# EAGLE board ACB-R1.1-43-CH04 (EAGLE 8.5.2)
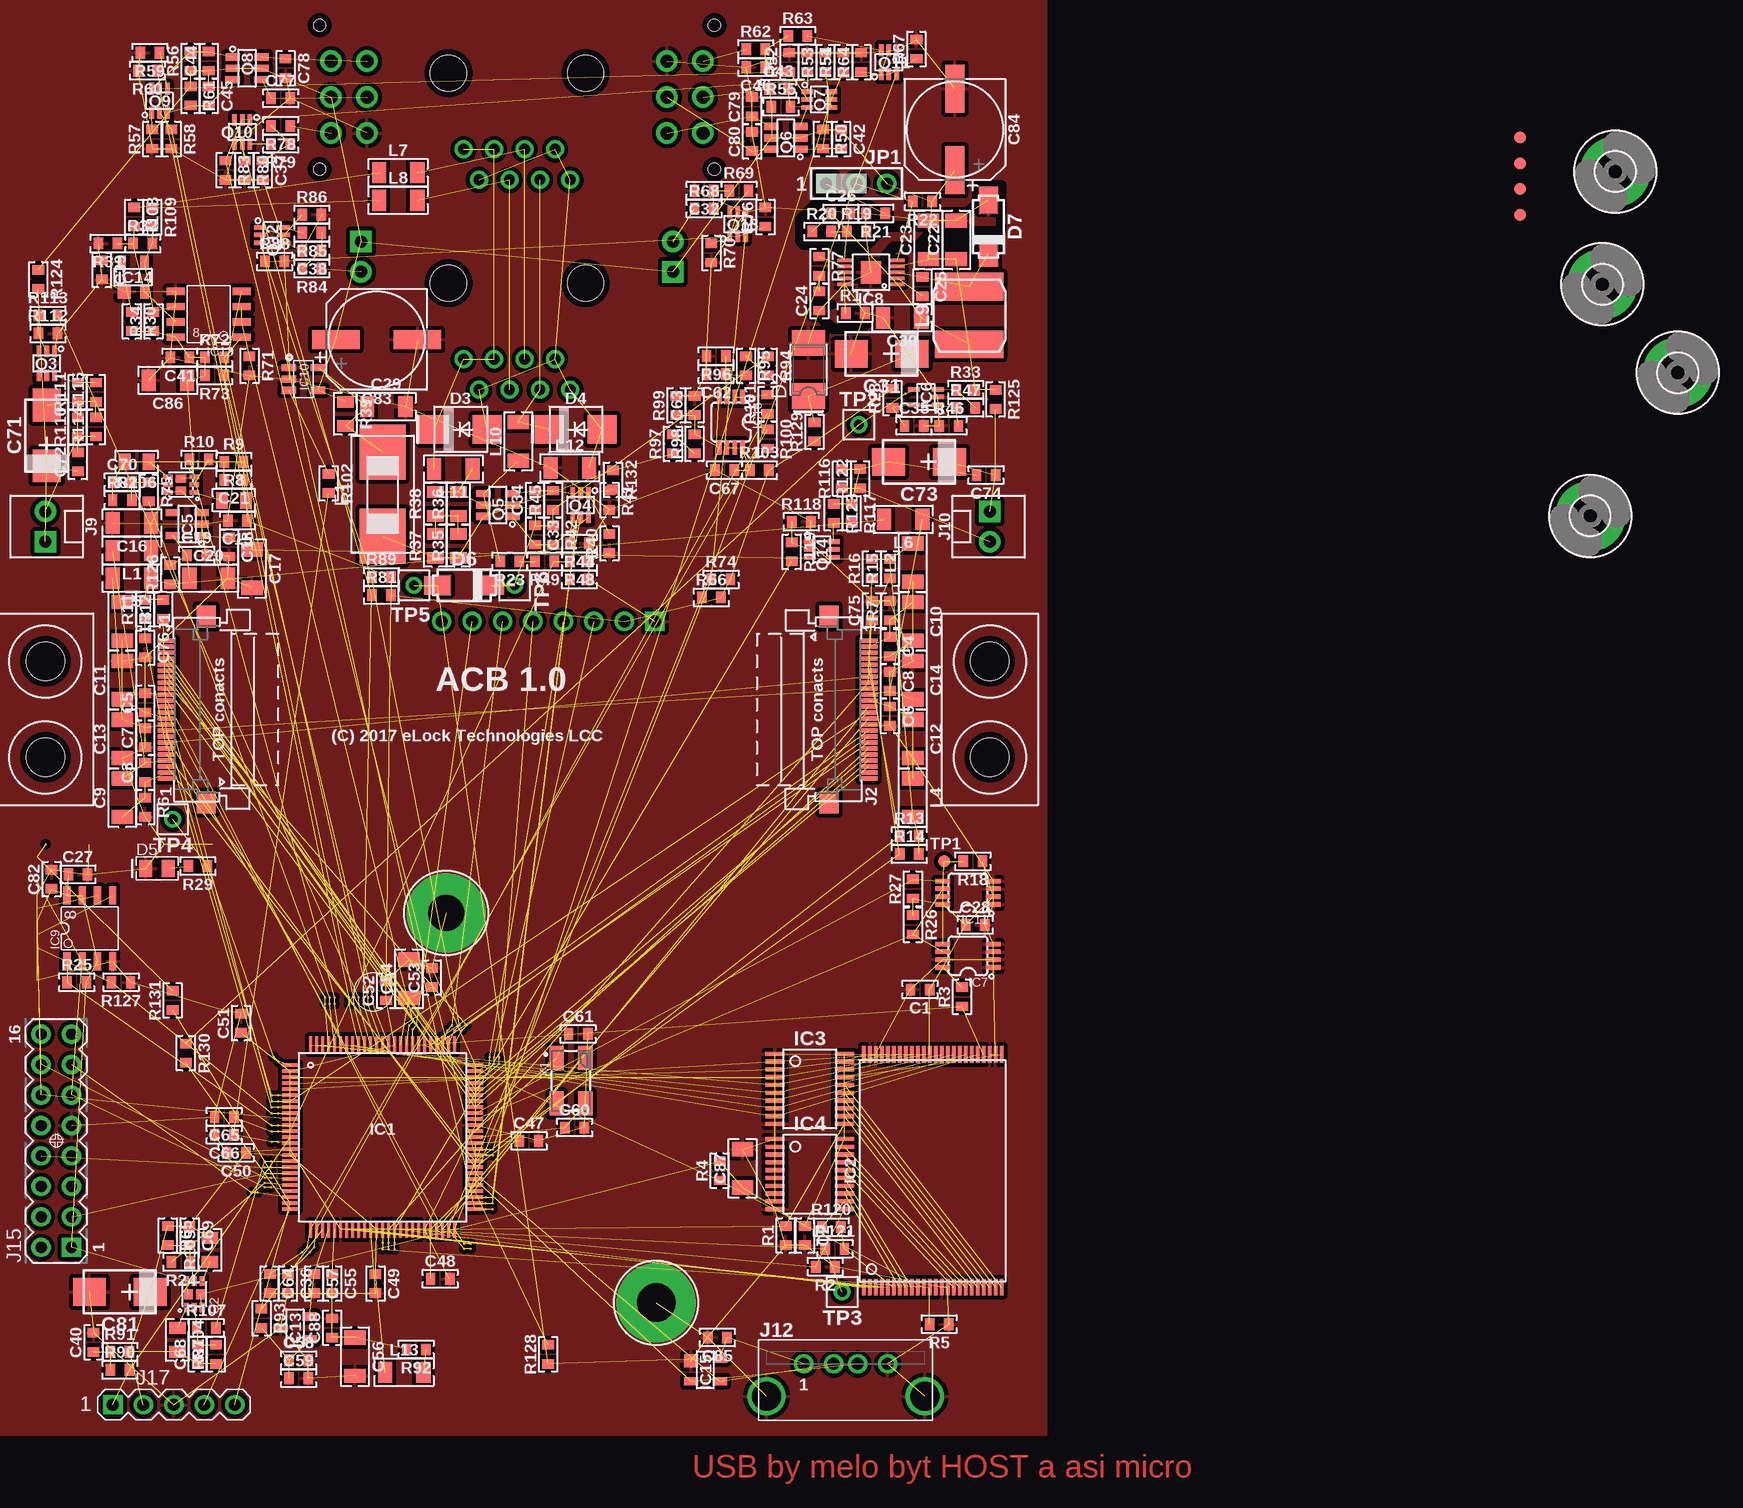
[diagram p0: board, top side]
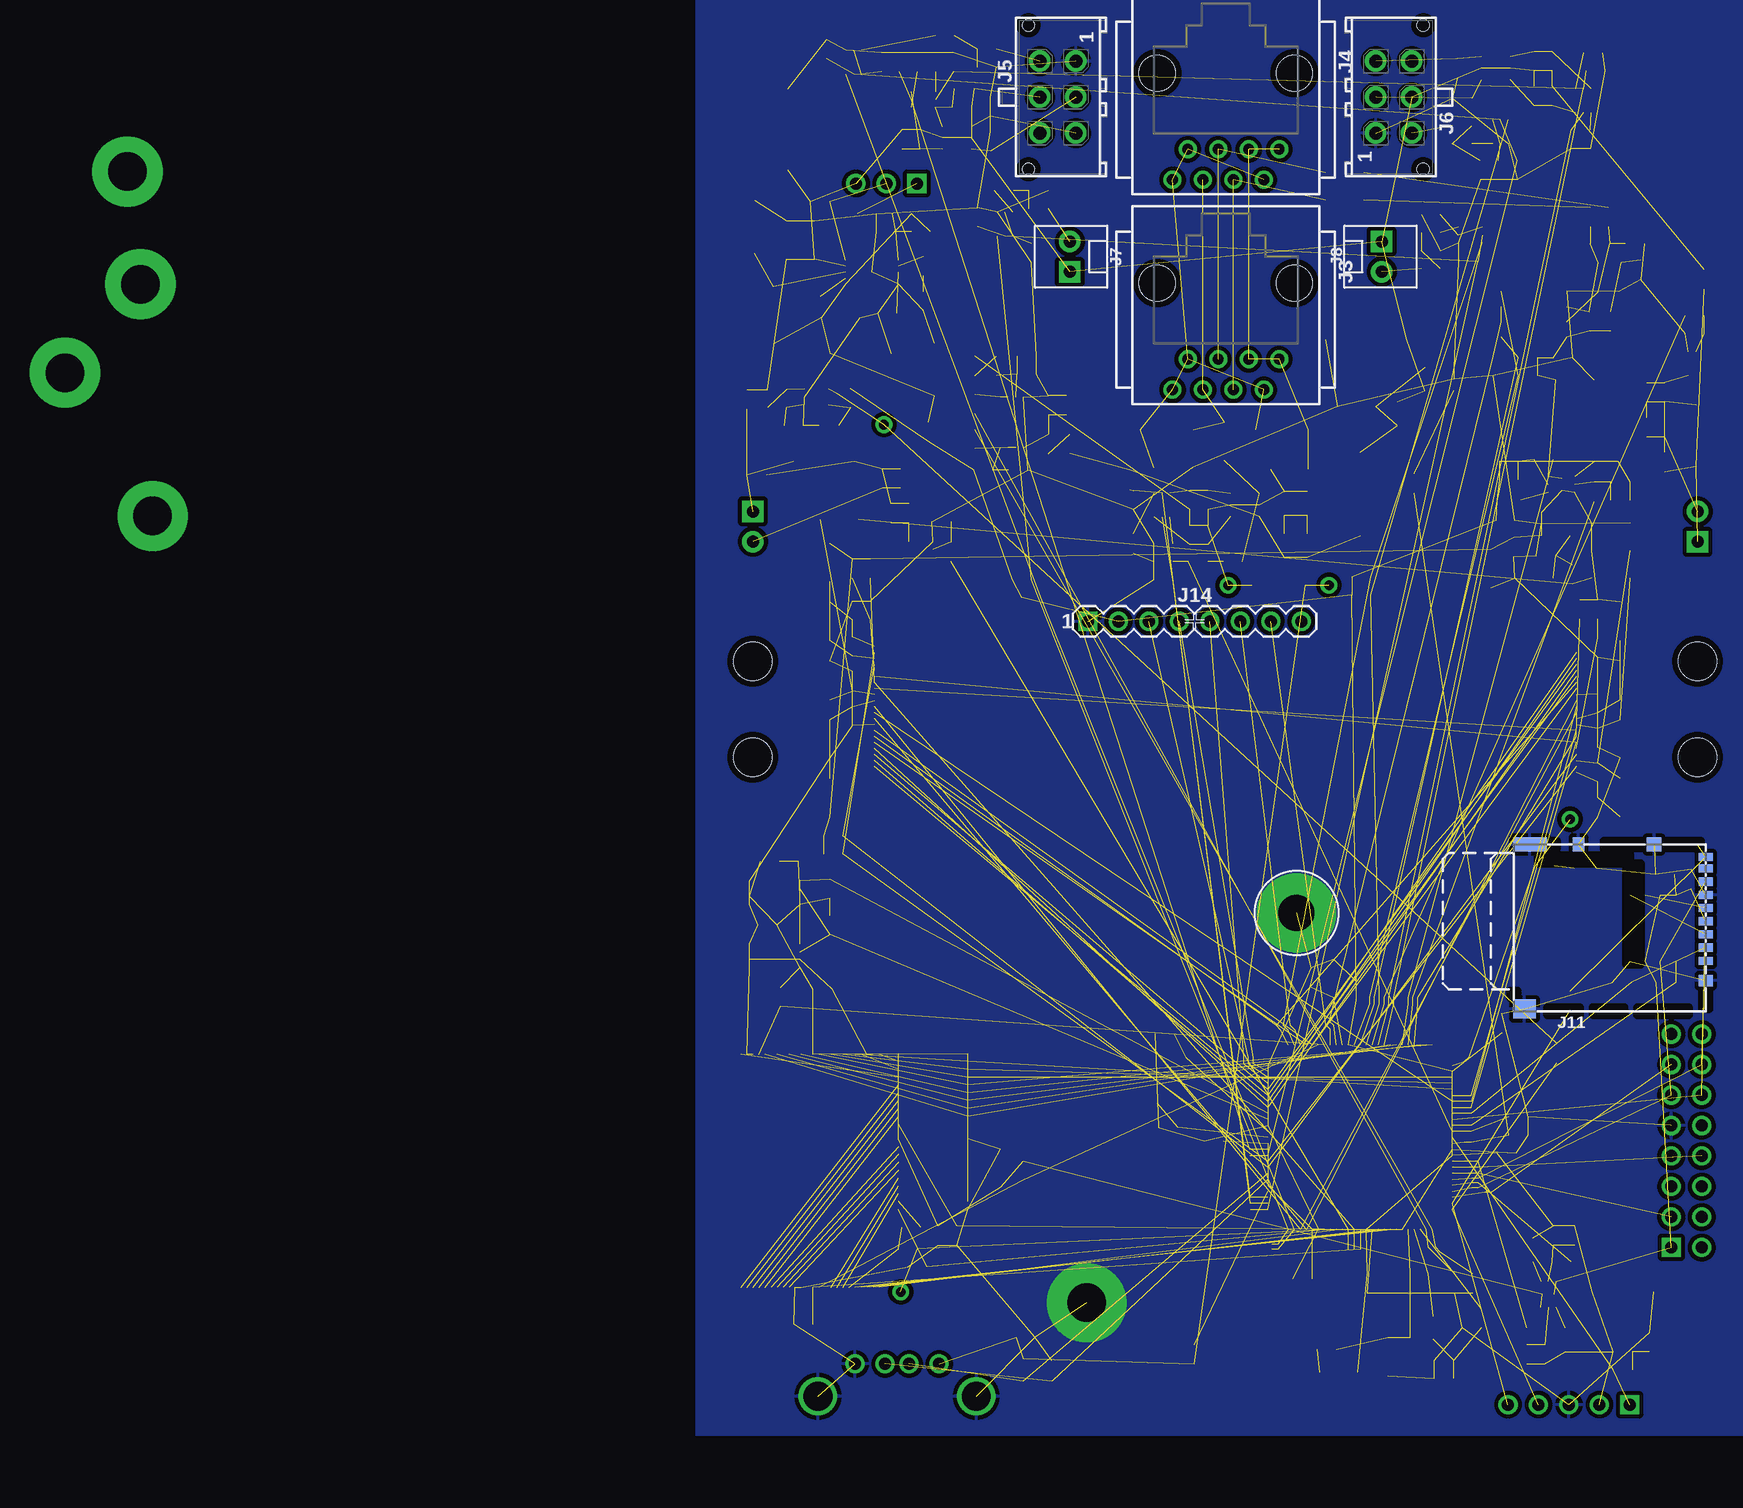
[diagram p1: board, bottom side, seen from below]

No outline drawn. Coordinates in mm, seen from the top.
Copper layers (1*16): Top 0.035mm / dielectric 1.5mm / Bottom 0.035mm
Design rules "default *": minimum track width 0.2mm, minimum drill 0.3mm, track to track 0.2mm, track to pad 0.2mm, pad to pad 0.2mm, via to via 0.2mm, smd to smd 0.001mm, copper to edge 0.5mm, drill to drill 0.2mm, minimum pad ring 0.3mm, minimum via ring 0.25mm, stop-mask expansion 0.1mm, vias tented up to drill 0.6mm, thermal gap 0.35mm
Net classes: 1 HV: clearance 0.3 mm to class 0
tRestrict: 34 lines

## Footprints (pad centres in the part's own frame; a part is rotated, then mirrored left to right if it is on the bottom)
0603 = smd 0.79 x 0.99: 1 -0.8,0; 2 0.8,0
1206 = smd 1.19 x 1.79: 1 -1.6,0; 2 1.6,0
CT-C = smd 2.743 x 2.311: + -2.54,0; - 2.54,0
CAP_8MM_DIA_SMT = smd 1.59 x 3.99: 1 0,3.4; 2 0,-3.4
SMA = smd 2.159 x 2.743: + -2.311,0.003; - 2.108,-0.002
SMB = smd 2.4 x 2.4: A 2.2,0; C -2.2,0
0805-POL = smd 1.092 x 1.397: 1+ -0.94,0; 2 0.94,0
SMA' = smd 2.21 x 1.575: A -2.223,0; K 2.223,0
LITTLEFUSE0154 = smd 4.6 x 3.8: 1 3.5,0; 2 -3.5,0
CAM-HOLDER = hole 3.2: 0,4; 0,-4
3,2-PAD = drill 3.2 pad 5.842: B3,2 0,0
TQFP100_14X14_0,5MM = smd 1.39 x 0.28: 1 -7.7,6; 2 -7.7,5.5; 3 -7.7,5; 4 -7.7,4.5; 5 -7.7,4; 6 -7.7,3.5; 7 -7.7,3; 8 -7.7,2.5; 9 -7.7,2; 10 -7.7,1.5; 11 -7.7,1; 12 -7.7,0.5; 13 -7.7,0; 14 -7.7,-0.5; 15 -7.7,-1; 16 -7.7,-1.5; 17 -7.7,-2; 18 -7.7,-2.5; 19 -7.7,-3; 20 -7.7,-3.5; 21 -7.7,-4; 22 -7.7,-4.5; 23 -7.7,-5; 24 -7.7,-5.5; 25 -7.7,-6; 51 7.7,-6; 52 7.7,-5.5; 53 7.7,-5; 54 7.7,-4.5; 55 7.7,-4; 56 7.7,-3.5; 57 7.7,-3; 58 7.7,-2.5; 59 7.7,-2; 60 7.7,-1.5; 61 7.7,-1; 62 7.7,-0.5; 63 7.7,0; 64 7.7,0.5; 65 7.7,1; 66 7.7,1.5; 67 7.7,2; 68 7.7,2.5; 69 7.7,3; 70 7.7,3.5; 71 7.7,4; 72 7.7,4.5; 73 7.7,5; 74 7.7,5.5; 75 7.7,6 | smd 0.28 x 1.39: 26 -6,-7.7; 27 -5.5,-7.7; 28 -5,-7.7; 29 -4.5,-7.7; 30 -4,-7.7; 31 -3.5,-7.7; 32 -3,-7.7; 33 -2.5,-7.7; 34 -2,-7.7; 35 -1.5,-7.7; 36 -1,-7.7; 37 -0.5,-7.7; 38 0,-7.7; 39 0.5,-7.7; 40 1,-7.7; 41 1.5,-7.7; 42 2,-7.7; 43 2.5,-7.7; 44 3,-7.7; 45 3.5,-7.7; 46 4,-7.7; 47 4.5,-7.7; 48 5,-7.7; 49 5.5,-7.7; 50 6,-7.7; 76 6,7.7; 77 5.5,7.7; 78 5,7.7; 79 4.5,7.7; 80 4,7.7; 81 3.5,7.7; 82 3,7.7; 83 2.5,7.7; 84 2,7.7; 85 1.5,7.7; 86 1,7.7; 87 0.5,7.7; 88 0,7.7; 89 -0.5,7.7; 90 -1,7.7; 91 -1.5,7.7; 92 -2,7.7; 93 -2.5,7.7; 94 -3,7.7; 95 -3.5,7.7; 96 -4,7.7; 97 -4.5,7.7; 98 -5,7.7; 99 -5.5,7.7; 100 -6,7.7
48-TSOP-I = smd 1.4 x 0.28: 1 -9.7,5.75; 2 -9.7,5.25; 3 -9.7,4.75; 4 -9.7,4.25; 5 -9.7,3.75; 6 -9.7,3.25; 7 -9.7,2.75; 8 -9.7,2.25; 9 -9.7,1.75; 10 -9.7,1.25; 11 -9.7,0.75; 12 -9.7,0.25; 13 -9.7,-0.25; 14 -9.7,-0.75; 15 -9.7,-1.25; 16 -9.7,-1.75; 17 -9.7,-2.25; 18 -9.7,-2.75; 19 -9.7,-3.25; 20 -9.7,-3.75; 21 -9.7,-4.25; 22 -9.7,-4.75; 23 -9.7,-5.25; 24 -9.7,-5.75; 25 9.7,-5.75; 26 9.7,-5.25; 27 9.7,-4.75; 28 9.7,-4.25; 29 9.7,-3.75; 30 9.7,-3.25; 31 9.7,-2.75; 32 9.7,-2.25; 33 9.7,-1.75; 34 9.7,-1.25; 35 9.7,-0.75; 36 9.7,-0.25; 37 9.7,0.25; 38 9.7,0.75; 39 9.7,1.25; 40 9.7,1.75; 41 9.7,2.25; 42 9.7,2.75; 43 9.7,3.25; 44 9.7,3.75; 45 9.7,4.25; 46 9.7,4.75; 47 9.7,5.25; 48 9.7,5.75
TSSOP20 = smd 1.6 x 0.35: 1 -2.9,2.925; 2 -2.9,2.275; 3 -2.9,1.625; 4 -2.9,0.975; 5 -2.9,0.325; 6 -2.9,-0.325; 7 -2.9,-0.975; 8 -2.9,-1.625; 9 -2.9,-2.275; 10 -2.9,-2.925; 11 2.9,-2.925; 12 2.9,-2.275; 13 2.9,-1.625; 14 2.9,-0.975; 15 2.9,-0.325; 16 2.9,0.325; 17 2.9,0.975; 18 2.9,1.625; 19 2.9,2.275; 20 2.9,2.925
SOT23-5 = smd 0.59 x 1.19: 1 -0.95,-1.2; 2 0,-1.2; 3 0.95,-1.2; 4 0.95,1.2; 5 -0.95,1.2
SC-70-5 = smd 0.39 x 0.99: 1 -0.65,-1; 2 0,-1; 3 0.65,-1; 4 0.65,1; 5 -0.65,1
MSOP-08 = smd 0.38 x 1.2: 1 -1,-2.1; 2 -0.35,-2.1; 3 0.3,-2.1; 4 0.95,-2.1; 5 0.95,2.1; 6 0.3,2.1; 7 -0.35,2.1; 8 -1,2.1
MSOP10EXP = smd 0.3 x 1.2: 1 -1,-2.2; 2 -0.5,-2.2; 3 0,-2.2; 4 0.5,-2.2; 5 1,-2.2; 6 1,2.2; 7 0.5,2.2; 8 0,2.2; 9 -0.5,2.2; 10 -1,2.2 | smd 1.88 x 1.68: EP 0,0
SO-08 = smd 0.61 x 1.524: 1 -1.905,-2.743; 2 -0.635,-2.743; 3 0.635,-2.743; 4 1.905,-2.743; 5 1.905,2.743; 6 0.635,2.743; 7 -0.635,2.743; 8 -1.905,2.743
SOT23-5' = smd 0.6 x 1.2: 1 -0.95,-1.206; 2 0,-1.206; 3 0.95,-1.206; 4 0.95,1.206; 5 -0.95,1.206
SO08 = smd 0.61 x 1.524: 1 -1.905,-2.743; 2 -0.635,-2.743; 3 0.635,-2.743; 4 1.905,-2.743; 5 1.905,2.743; 6 0.635,2.743; 7 -0.635,2.743; 8 -1.905,2.743
SOT23 = smd 0.69 x 1.19: 1 0.95,1.2; 2 -0.95,1.2; 3 0,-1.2
SOT-143 = smd 1.09 x 1.19: 1 -0.75,-1.2 | smd 0.69 x 1.19: 2 0.95,-1.2; 3 0.95,1.2; 4 -0.95,1.2
FH12A-24S-05SH = smd 0.3 x 1.5: 1 -5.75,2.8; 2 -5.25,2.8; 3 -4.75,2.8; 4 -4.25,2.8; 5 -3.75,2.8; 6 -3.25,2.8; 7 -2.75,2.8; 8 -2.25,2.8; 9 -1.75,2.8; 10 -1.25,2.8; 11 -0.75,2.8; 12 -0.25,2.8; 13 0.25,2.8; 14 0.75,2.8; 15 1.25,2.8; 16 1.75,2.8; 17 2.25,2.8; 18 2.75,2.8; 19 3.25,2.8; 20 3.75,2.8; 21 4.25,2.8; 22 4.75,2.8; 23 5.25,2.8; 24 5.75,2.8 | smd 1.8 x 1.6: C1 -7.75,-0.5; C2 7.75,-0.5
RJ-8PIN = drill 0.9 pad 1.4: 1 -4.445,6.35; 2 -3.175,8.89; 3 -1.905,6.35; 4 -0.635,8.89; 5 0.635,6.35; 6 1.905,8.89; 7 3.175,6.35; 8 4.445,8.89 | hole 3: 5.715,0; -5.715,0
MOLEX430450613 = drill 1.1 pad 1.8: 1 3,-1.5; 2 0,-1.5; 3 -3,-1.5; 4 3,1.5; 5 0,1.5; 6 -3,1.5 | hole 1: 6,2.45; -6,2.45
3-641215-2 = drill 1 pad 1.8 square: 1 1.27,0 | drill 1 pad 1.8: 2 -1.27,0
DM3AT = smd 0.69 x 1.19: 1 3.3,8; 2 2.2,8; 3 1.1,8; 4 0,8; 5 -1.1,8; 6 -2.2,8; 7 -3.3,8; 8 -4.4,8; G2 -5.35,8 | smd 0.99 x 1.19: G1 4.95,8 | smd 1.19 x 1.19: G3 -6.4,3.7 | smd 1.19 x 0.99: G4 -6.4,-2.6 | smd 1.19 x 2.79: G5 -6.4,-6.65 | smd 1.59 x 1.89: G6 7.3,-7.1
KONEKT1_USB_A_180 = drill 1 pad 1.6: 1_VCC -3.5,2.7; 2_D+ -1,2.7; 3_D- 1,2.7; 4_GND 3.5,2.7 | drill 2.4 pad 3.2: SH1 -6.6,0; SH2 6.6,0
MA08-1-MALE = drill 1 pad 1.6 square: 1 -8.89,0 | drill 1 pad 1.6: 2 -6.35,0; 3 -3.81,0; 4 -1.27,0; 5 1.27,0; 6 3.81,0; 7 6.35,0; 8 8.89,0
MA08-2 = drill 1 pad 1.6 square: 1 -8.89,-1.27 | drill 1 pad 1.6: 2 -8.89,1.27; 3 -6.35,-1.27; 4 -6.35,1.27; 5 -3.81,-1.27; 6 -3.81,1.27; 7 -1.27,-1.27; 8 -1.27,1.27; 9 1.27,-1.27; 10 1.27,1.27; 11 3.81,-1.27; 12 3.81,1.27; 13 6.35,-1.27; 14 6.35,1.27; 15 8.89,-1.27; 16 8.89,1.27
MA05-1 = drill 1 pad 1.6 square: 1 -5.08,0 | drill 1 pad 1.6: 2 -2.54,0; 3 0,0; 4 2.54,0; 5 5.08,0
JP3CLOSE12 = drill 1 pad 1.626 square: 1 -2.54,0 | drill 1 pad 1.626: 2 0,0; 3 2.54,0
NR6028 = smd 2.3 x 5.7: 1 2.4,0; 2 -2.4,0
TEMP-PAD = smd 0.2 x 0.2: P$1 0,0
PCB-VPS = drill 3.2 pad 6.6: VPS_PCB_1 55,4
BT_MODULE_BRD = drill 3 pad 6.6: 1 25.5,20.5
MICRO_FET = smd 0.4 x 0.8: 1 -0.65,-1.1; 2 0,-1.1; 3 0.65,-1.1; 4 0.65,1.1; 5 0,1.1; 6 -0.65,1.1 | smd 0.7 x 0.86: P1 -0.5,0; P2 0.5,0
SC70-6 = smd 0.39 x 0.99: 1 -0.65,-1; 2 0,-1; 3 0.65,-1; 4 0.65,1; 5 0,1; 6 -0.65,1
SSOT-6 = smd 0.6 x 1.2: 1 -0.95,-1.2; 2 0,-1.2; 3 0.95,-1.206; 4 0.95,1.2; 5 0,1.2; 6 -0.95,1.2
0805 = smd 0.99 x 1.39: 1 -1,0; 2 1,0
SMD_ROUND_1MM = smd 1 x 1: P$1 0,0
TH_ROUND_14MM08MM = drill 0.8 pad 1.4: P$1 0,0
FIDUCIAL_1MM = smd 1 x 1: 1 0,0
7B = smd 2 x 1.2: 1 -1.9,-1.2; 2 1.9,-1.2; 3 1.9,1.2; 4 -1.9,1.2

## Placement (x,y rotation side)
C1  100n  [0603]  78,37.6 180 top
C2  100n  [0603]  68.4,17.1 270 top
C3  100n  [0603]  13.4,55.7 90 top
C4  100n  [0603]  75.5,66.2 270 top
C5  100n  [0603]  13.4,61.5 90 top
C6  100n  [0603]  75.5,60.4 270 top
C7  100n  [0603]  13.4,58.6 90 top
C8  100n  [0603]  75.5,63.3 270 top
C9  10uTA  [1206]  11.5,53.6 90 top
C10  10uTA  [1206]  77.4,68.3 270 top
C11  10uTA  [1206]  11.5,63.4 90 top
C12  10uTA  [1206]  77.4,58.5 270 top
C13  10uTA  [1206]  11.5,58.5 90 top
C14  10uTA  [1206]  77.4,63.4 270 top
C15  10u  [0603]  21.1,76.7 180 top
C16  10uTA  [1206]  12.3,76.5 180 top
C17  10uTA  [1206]  22.3,72.7 270 top
C18  100n  [0603]  20.4,74.5 270 top
C19  100n  [0603]  17.7,73.8 0 top
C20  10uTA  [1206]  18.7,71.9 0 top
C21  1n->10n  [0603]  20.8,80.1 180 top
C22  4u7/50  [1206]  81,100.1 90 top
C23  4u7/50  [1206]  78.7,100.1 90 top
C24  1n  [0603]  69.6,95 90 top
C25  470n/25  [0603]  78.2,96.2 270 top
C26  10p  [0603]  71.4,102.3 0 top
C27  100n  [0603]  7.8,47.2 0 top
C28  100n  [0603]  82.6,43 0 top
C29  4u7/50  [1206]  33.5,86.2 0 top
C30  47u/6.3  [1206]  76.5,93.6 180 top
C31  47uTC  [CT-C]  74.8,90.6 180 top
C32  100n  [0603]  60,104.2 180 top
C33  100n  [0603]  45.9,75.5 270 top
C34  1n  [0603]  45.9,78.4 90 top
C35  100n  [0603]  77.5,84.6 0 top
C36  100n  [0603]  25.3,13.1 270 top
C37  100n  [0603]  23.2,105.9 270 top
C38  100n  [0603]  27.3,99.2 180 top
C39  100n  [0603]  9.8,97.6 270 top
C40  100n  [0603]  9.1,8.2 90 top
C41  100n  [0603]  16.3,90.3 180 top
C42  100n  [0603]  71.4,108.5 270 top
C43  1n  [0603]  66.2,112.7 0 top
C44  1n  [0603]  18.7,115 90 top
C45  100n  [0603]  18.7,112.1 270 top
C46  100n  [0603]  64.3,114.5 180 top
C47  100n  [0603]  45.4,25 0 top
C48  1u  [0603]  38,13.5 0 top
C49  100n  [0603]  32.6,13.1 270 top
C50  1u  [0603]  21,24 180 top
C51  100n  [0603]  21.4,34.8 90 top
C52  1u  [0603]  33.5,37.5 90 top
C53  10u  [0603]  37.3,38.6 90 top
C54  10uTA  [1206]  35.4,38.5 90 top
C55  100n  [0603]  29,13.1 270 top
C56  10uTA  [1206]  30.9,7 270 top
C57  100n->10n  [0603]  27.5,13.1 270 top
C58  100n  [0603]  26.2,6.7 0 top
C59  1u->100n  [0603]  26.2,5.2 0 top
C60  18p  [0603]  49.2,26.1 0 top
C61  18p  [0603]  49.5,33.9 0 top
C62  1n  [0603]  61,88.9 180 top
C63  1n  [0603]  59.2,86.3 90 top
C64  100n  [0603]  23.8,13.1 270 top
C65  1n  [0603]  20,27 180 top
C66  10n  [0603]  20,25.5 180 top
C67  10u  [0603]  61.7,80.9 180 top
C68  1n->10n  [0603]  17.8,7.2 90 top
C69  1n  [0603]  17.1,17.1 270 top
C70  1n  [0603]  11.5,79.9 0 top
C71  47uTC  [CT-C]  5.2,83.8 90 top
C72  100n  [0603]  7.8,81.6 90 top
C73  47uTC  [CT-C]  77.9,81.6 180 top
C74  100n  [0603]  83.5,80.5 180 top
C75  100n  [0603]  74,69.2 90 top
C76  100n  [0603]  13.4,66.1 270 top
C77  100n  [0603]  24.7,111.9 0 top
C78  100n  [0603]  25.1,114.4 270 top
C79  100n  [0603]  64,111.2 90 top
C80  100n  [0603]  64,108.3 90 top
C81  47uTC  [CT-C]  11.3,12.4 180 top
C82  1u  [0603]  5.6,46.8 90 top
C83  220u/25V  [CAP_8MM_DIA_SMT]  32.7,91.8 90 top
C84  220u/25V  [CAP_8MM_DIA_SMT]  80.9,109.3 180 top
C85  100n  [0603]  61.1,8.6 180 top
C86  10uTA  [1206]  15.3,88.4 180 top
C87  10uTA  [1206]  63.2,22.7 90 top
C88  10u  [0603]  29,9.4 90 top
D2  SMLVT3V3  [SMA]  68.7,89.4 90 top
D3  P6SMB20A  [SMB]  39.7,84.3 0 top
D4  P6SMB20A  [SMB]  49.3,84.3 0 top
D5  LED-GREEN  [0805-POL]  14.4,47.7 0 top
D6  SS14  [SMA']  40,71.3 0 top
D7  SS14  [SMA']  83.7,101.2 270 top
F1  T1A-LITTLEFUSE0154  [LITTLEFUSE0154]  33.2,78.9 90 top
H1  CAM-HOLDER  [CAM-HOLDER]  83.82,60.96 0 top
H2  CAM-HOLDER  [CAM-HOLDER]  5.08,60.96 0 top
H3  MOUNT-PAD-ROUND3.2  [3,2-PAD]  135.95,105.79 0 top
H4  MOUNT-PAD-ROUND3.2  [3,2-PAD]  134.87,96.39 0 top
H5  MOUNT-PAD-ROUND3.2  [3,2-PAD]  133.86,77.09 0 top
H6  MOUNT-PAD-ROUND3.2  [3,2-PAD]  141.16,89.03 0 top
IC1  PIC32MX470F512L-I/PF  [TQFP100_14X14_0,5MM]  33.2,25.3 0 top
IC2  R1LV1616  [48-TSOP-I]  79.05,22.5 90 top
IC3  74LVC573APW-TSSOP20  [TSSOP20]  68.8,29.32 0 top
IC4  74LVC573APW-TSSOP20  [TSSOP20]  68.8,22.23 0 top
IC5  TLV73315PDBV  [SOT23-5]  16.9,76.4 90 top
IC6  MIC841LYC  [SC-70-5]  78.5,87 90 top
IC7  24LC32A-I/MS  [MSOP-08]  82,40.45 90 top
IC8  LT3971EMSE  [MSOP10EXP]  73.9,97.4 90 top
IC9  AT25SF321-SSHD  [SO-08]  8.8,42.7 0 top
IC10  MAX9938HEUK+T  [SOT23-5']  26.6,88.5 270 top
IC11  24LC32A-I/MS  [MSOP-08]  82,45.7 90 top
IC12  SN65HVD12D  [SO08]  18.7,93.9 90 top
IC13  REF3025  [SOT23]  25.9,9.4 270 top
IC14  TPD2E001DZDR  [SOT-143]  12.4,97 0 top
IC15  TPD2E001DZDR  [SOT-143]  60.1,5.9 270 top
IC16  MCP6042-I/MS  [MSOP-08]  62.2,84.9 180 top
J1  FH12A-24S-0.5SH  [FH12A-24S-05SH]  18,60.95 90 top
J2  FH12A-24S-0.5SH  [FH12A-24S-05SH]  70.9,60.95 270 top
J3  RJ-8PIN  [RJ-8PIN]  44.4,96.5 180 bottom
J4  RJ-8PIN  [RJ-8PIN]  44.4,114 180 bottom
J5  MOLEX430450613  [MOLEX430450613]  58.4,112 90 bottom
J6  MOLEX430450613  [MOLEX430450613]  30.4,112 270 bottom
J7  3-641215-2  [3-641215-2]  57.4,98.7 270 bottom
J8  3-641215-2  [3-641215-2]  31.4,98.7 90 bottom
J9  3-641215-2  [3-641215-2]  5.08,76.2 270 top
J10  3-641215-2  [3-641215-2]  83.82,76.2 90 top
J11  DNP-DM3AT  [DM3AT]  12.4,43.3 270 bottom
J12  USB_A_180  [KONEKT1_USB_A_180]  71.8,3.7 0 top
J14  pin1x8  [MA08-1-MALE]  47,68.3 0 bottom
J15  pin2x8  [MA08-2]  6,25 90 top
J17  DNP-open-hole  [MA05-1]  15.8,3 0 top
JP1  JP3CLOSE12  [JP3CLOSE12]  72.7,104.8 0 top
L1  LQM31PN3R3M00L  [1206]  12.3,74.2 180 top
L2  LQM31PN3R3M00L  [1206]  77.4,73.2 90 top
L3  LQM31PN3R3M00L  [1206]  11.5,68.3 270 top
L4  LQM31PN3R3M00L  [1206]  77.4,53.6 270 top
L5  LQM31PN3R3M00L  [1206]  12.3,71.9 180 top
L6  LQM31PN3R3M00L  [1206]  76.6,76.8 180 top
L7  HI1206T500R  [1206]  34.5,105.7 0 top
L8  HI1206T500R  [1206]  34.5,103.4 0 top
L9  NR6028T4R7M  [NR6028]  82.1,93.8 90 top
L10  HI1206T500R  [1206]  44.5,83.3 90 top
L11  HI1206T500R  [1206]  39.1,81 180 top
L12  HI1206T500R  [1206]  48.8,81.1 0 top
L13  LQM31PN3R3M00L  [1206]  35,5.7 0 top
O1  PIC-OUT  [TEMP-PAD]  24.5,31.6 0 top
O2  PIC-RPX  [TEMP-PAD]  24.5,28.8 90 top
O3  PIC-RPX  [TEMP-PAD]  24.5,28.3 90 top
O4  PIC-RPX  [TEMP-PAD]  24.5,27.8 90 top
O5  PIC-RPX  [TEMP-PAD]  24.5,27.3 0 top
O6  PIC-RPX  [TEMP-PAD]  24.5,26.3 0 top
O7  PIC-RPX  [TEMP-PAD]  24.5,25.8 0 top
O8  PIC-RPX  [TEMP-PAD]  24.5,24.9 0 top
O9  PIC-OUT  [TEMP-PAD]  23.9,23.3 0 top
O10  PIC-RPX  [TEMP-PAD]  23.9,22.8 0 top
O11  PIC-RPX  [TEMP-PAD]  23.9,22.3 0 top
O12  PIC-RPX  [TEMP-PAD]  23.9,21.9 0 top
O13  PIC-RPX  [TEMP-PAD]  23.9,21.1 0 top
O14  PIC-RPX  [TEMP-PAD]  22.8,20.7 270 top
O15  PIC-RPX  [TEMP-PAD]  26.9,16.1 90 top
O16  PIC-RPX  [TEMP-PAD]  27.5,16.1 0 top
O17  PIC-OUT  [TEMP-PAD]  33.2,16.5 0 top
O18  PIC-RPX  [TEMP-PAD]  33.7,16.5 0 top
O19  PIC-RPX  [TEMP-PAD]  34.2,16.5 0 top
O20  PIC-RPX  [TEMP-PAD]  40,16 0 top
O21  PIC-RPX  [TEMP-PAD]  40,16.4 0 top
O22  PIC-OUT  [TEMP-PAD]  28.4,36.4 0 top
O23  PIC-OUT  [TEMP-PAD]  28.8,36.4 0 top
O24  PIC-OUT  [TEMP-PAD]  29.2,36.4 0 top
O25  PIC-OUT  [TEMP-PAD]  30.4,36.4 0 top
O26  PIC-OUT  [TEMP-PAD]  30.8,36.4 0 top
O27  PIC-RPX  [TEMP-PAD]  31.2,36.4 0 top
O28  PIC-RPX  [TEMP-PAD]  31.6,36.4 0 top
O29  PIC-RPX  [TEMP-PAD]  32,36.4 0 top
O30  PIC-RPX  [TEMP-PAD]  32.4,36.4 0 top
O31  PIC-OUT  [TEMP-PAD]  35.4,34.6 0 top
O32  PIC-OUT  [TEMP-PAD]  35.7,34.3 0 top
O33  PIC-RPX  [TEMP-PAD]  38.6,34.2 0 top
O34  PIC-RPX  [TEMP-PAD]  39.2,34.2 0 top
O35  PIC-RPX  [TEMP-PAD]  40.2,34.6 0 top
O36  PIC-RPX  [TEMP-PAD]  42.1,31.4 90 top
O37  PIC-RPX  [TEMP-PAD]  42.5,31.4 90 top
O38  PIC-RPX  [TEMP-PAD]  42.9,31.4 90 top
O39  PIC-OUT  [TEMP-PAD]  41.85,24.3 0 top
O40  PIC-OUT  [TEMP-PAD]  41.85,23.8 0 top
O41  PIC-RPX  [TEMP-PAD]  42.35,20.3 180 top
O42  PIC-RPX  [TEMP-PAD]  41.8,19.8 180 top
O43  PIC-RPX  [TEMP-PAD]  41.8,19.3 0 top
O44  PIC-OUT  [TEMP-PAD]  23.9,21.5 0 top
PCB2  DNP-PCB-VPS  [PCB-VPS]  1,7.5 0 top
PCB3  DNP-PCB-BT  [BT_MODULE_BRD]  59,69.5 270 bottom
Q1  SSM6P49NU,LFPZ  [MICRO_FET]  16.4,79.7 90 top
Q2  SSM6P49NU,LFPZ  [MICRO_FET]  17.5,12.2 0 top
Q3  FDG6303N  [SC70-6]  5.2,89.8 180 top
Q4  FDG6303N  [SC70-6]  49.7,78 180 top
Q5  FDC6506P  [SSOT-6]  42.8,78 90 top
Q6  FDC6506P  [SSOT-6]  66.8,108.6 90 top
Q7  FDG6303N  [SC70-6]  69.6,111.8 270 top
Q8  FDC6506P  [SSOT-6]  21.9,114.4 270 top
Q9  FDG6303N  [SC70-6]  14.6,111.7 0 top
Q10  FDG6303N  [SC70-6]  21.5,109.1 180 top
Q11  FDG6303N  [SC70-6]  75.4,114.9 0 top
Q12  FDG6303N  [SC70-6]  24,100.5 270 top
Q13  FDG6303N  [SC70-6]  62.8,101.4 0 top
Q14  FDG6303N  [SC70-6]  69.8,74.3 270 top
R1  1M  [0603]  66.8,17.1 90 top
R2  1M  [0603]  70.1,14.5 180 top
R3  1M  [0603]  81.5,37 90 top
R4  1M  [0603]  61.3,22.5 90 top
R5  1M  [0603]  79.6,9.7 180 top
R6  0R  [0603]  13.4,52.8 270 top
R7  0R  [0603]  75.5,69.2 90 top
R8  1R  [0805]  20.8,78.4 0 top
R9  1M  [0603]  20.8,81.6 0 top
R10  100k  [0603]  17.9,81.8 0 top
R11  10k  [0603]  13.4,69.3 90 top
R12  100k  [0603]  14.9,69.3 90 top
R13  10k  [0603]  77.1,50.4 0 top
R14  10k  [0603]  77.1,48.9 0 top
R15  10k  [0603]  75.5,72.7 90 top
R16  100k  [0603]  74,72.7 90 top
R17  47k  [0603]  72.6,94 0 top
R18  10k  [0603]  82.4,48.3 180 top
R19  560k  [0603]  72.7,100.8 0 top
R20  1M  [0603]  69.8,100.8 0 top
R21  1M  [0603]  74.3,102.3 180 top
R22  4M99  [0603]  78.2,103.3 180 top
R23  0R/1M  [0603]  43.8,73.3 180 top
R24  100k  [0603]  16.4,14.9 180 top
R25  1M  [0603]  7.7,38.2 0 top
R26  10k  [0603]  77.4,43 270 top
R27  10k  [0603]  77.4,46 90 top
R28  100R  [0603]  75.7,86.9 90 top
R29  300R  [0603]  17.8,47.9 180 top
R30  1M  [0603]  12.3,93.3 270 top
R31  1M  [0603]  10.3,99.8 180 top
R32  1M  [0603]  13.2,99.8 0 top
R33  4M99  [0603]  81.8,87.6 0 top
R34  1M  [0603]  14.1,93.3 90 top
R35  1k  [0805]  39.5,74.6 90 top
R36  1k  [0805]  39.5,78.1 90 top
R37  1k  [0805]  37.6,74.6 90 top
R38  1k  [0805]  37.6,78.1 90 top
R39  0.025R  [0805]  30.1,85.6 270 top
R40  300k  [0603]  52.1,74.8 90 top
R41  1M  [0603]  52.1,78.4 270 top
R42  1M  [0603]  47.4,75.5 270 top
R43  300k  [0603]  49.6,74.8 180 top
R44  1M  [0603]  49.6,71.8 0 top
R45  1M  [0603]  47.4,78.4 90 top
R46  560k  [0603]  80.4,84.6 0 top
R47  100k  [0603]  81.8,86.1 0 top
R48  1M  [0603]  49.6,73.3 180 top
R49  1M  [0603]  46.7,73.3 180 top
R50  1M  [0603]  69.9,108.5 270 top
R51  300k  [0603]  68.6,114.9 270 top
R52  1M  [0603]  67.1,114.9 90 top
R53  300k  [0603]  70.1,114.9 90 top
R54  1M  [0603]  71.6,114.9 90 top
R55  1M  [0603]  66.4,111.2 0 top
R56  1M  [0603]  17.2,115 90 top
R57  300k  [0603]  14,108.5 90 top
R58  1M  [0603]  15.6,108.5 270 top
R59  300k  [0603]  13.8,115.7 180 top
R60  1M  [0603]  13.6,114.2 180 top
R61  1M  [0603]  17.2,112.1 270 top
R62  100R  [0603]  64.3,116 0 top
R63  1k->4k7  [0603]  67.8,117.1 0 top
R64  1k  [0603]  73.1,114.9 90 top
R65  1M  [0603]  15.3,17.1 270 top
R66  100k  [0603]  60.6,70.3 0 top
R67  1M  [0603]  77.7,116 90 top
R68  100R  [0603]  60,102.7 0 top
R69  1k->4k7  [0603]  62.9,104.2 0 top
R70  1k  [0603]  60.6,99 270 top
R71  10k  [0603]  22.1,89.6 270 top
R72  1M  [0603]  19.2,90.3 0 top
R73  1M  [0603]  19.2,88.8 180 top
R74  100k  [0603]  61.4,71.8 0 top
R75  100k  [0603]  13.7,79.1 270 top
R76  1M  [0603]  65.1,102 90 top
R77  47k  [0603]  69.6,97.9 270 top
R78  100R  [0603]  24.7,109.6 180 top
R79  1k->4k7  [0603]  24.7,108.1 180 top
R80  1k  [0603]  21.7,105.9 270 top
R81  100k  [0603]  33.1,70.5 0 top
R82  1M  [0603]  11.5,78.4 0 top
R83  1M  [0603]  20.1,105.9 270 top
R84  100R  [0603]  27.3,97.7 180 top
R85  1k->4k7  [0603]  27.3,100.7 180 top
R86  1k  [0603]  27.3,102.2 0 top
R87  1M  [0603]  19.3,7.2 90 top
R88  1M  [0603]  24.2,98.3 0 top
R89  100k  [0603]  33.1,72 0 top
R90  1k  [0603]  11.3,5.9 0 top
R91  10k  [0603]  11.3,7.4 0 top
R92  10R  [0603]  36,7.6 180 top
R93  300R  [0603]  23.1,10.2 270 top
R94  180k  [0603]  65.3,89.6 270 top
R95  4M99  [0603]  63.5,89.6 270 top
R96  560k  [0603]  61,90.4 180 top
R97  180k  [0603]  57.4,83.1 90 top
R98  4M99  [0603]  59.2,83.1 90 top
R99  560k  [0603]  57.7,86.3 90 top
R100  2k2  [0603]  65.3,83.5 270 top
R101  2k2  [0603]  65.3,86.4 90 top
R102  1k  [0603]  28.7,79.8 270 top
R103  300R  [0603]  64.6,80.9 0 top
R104  1R  [0805]  16.1,8.4 270 top
R105  1R  [0805]  18.8,15.9 90 top
R106  1R  [0805]  12.7,81.6 180 top
R107  100k  [0603]  18.5,9.4 0 top
R108  10R  [0603]  12.5,102 270 top
R109  10R  [0603]  14,102 270 top
R110  100R  [0603]  7.8,84.5 90 top
R111  100R  [0603]  7.8,87.4 90 top
R112  1M  [0603]  5.3,92.3 0 top
R113  100R  [0603]  5.3,93.8 0 top
R114  100R  [0603]  9.3,84.5 90 top
R115  100R  [0603]  9.3,87.4 90 top
R116  100R  [0603]  71.5,80.2 90 top
R117  100R  [0603]  72.3,77.3 270 top
R118  1M  [0603]  68.1,76.6 0 top
R119  100R  [0603]  67.3,74.1 270 top
R120  0R  [0603]  70.6,17.8 0 top
R121  DNP  [0603]  70.9,16 0 top
R122  100R  [0603]  73,80.2 90 top
R123  100R  [0603]  70.8,77.3 270 top
R124  0R  [0603]  4.5,96.8 270 top
R125  0R  [0603]  84.3,86.8 270 top
R126  0R  [0603]  15.5,72.2 90 top
R127  1M  [0603]  11.4,38.2 180 top
R128  10k  [0603]  47,7.2 90 top
R129  DNP/0R  [0603]  69.2,84.1 90 top
R130  100k  [0603]  16.8,32.3 270 top
R131  100k  [0603]  15.7,36.7 90 top
R132  1M  [0603]  52.4,80.1 270 top
T1  PIC-OUT  [TEMP-PAD]  42.4,24.3 0 top
T2  PIC-OUT  [TEMP-PAD]  30.8,36.95 0 top
T3  PIC-RPX  [TEMP-PAD]  23.95,25.8 180 top
T4  PIC-OUT  [TEMP-PAD]  30.4,36.95 270 top
T5  PIC-OUT  [TEMP-PAD]  42.35,19.8 180 top
T6  PIC-OUT  [TEMP-PAD]  42.4,23.8 180 top
T7  PIC-OUT  [TEMP-PAD]  41.8,20.3 180 top
T8  PIC-OUT  [TEMP-PAD]  42.35,19.3 180 top
T9  PIC-RPX  [TEMP-PAD]  31.6,36.95 180 top
T10  PIC-RPX  [TEMP-PAD]  40.55,16 0 top
T11  PIC-RPX  [TEMP-PAD]  39.6,34.6 0 top
T12  PIC-RPX  [TEMP-PAD]  40.55,16.4 0 top
T13  PIC-RPX  [TEMP-PAD]  32,36.95 0 top
T14  PIC-RPX  [TEMP-PAD]  32.4,36.95 270 top
T15  PIC-OUT  [TEMP-PAD]  35.75,34.95 270 top
T16  PIC-RPX  [TEMP-PAD]  23.95,28.3 90 top
T17  PIC-RPX  [TEMP-PAD]  39.8,34.2 270 top
T18  PIC-RPX  [TEMP-PAD]  23.95,28.8 270 top
T19  PIC-RPX  [TEMP-PAD]  23.95,27.8 0 top
T20  PIC-OUT  [TEMP-PAD]  28.4,36.95 180 top
T21  PIC-OUT  [TEMP-PAD]  33.7,15.95 270 top
T22  PIC-RPX  [TEMP-PAD]  23.35,21.1 180 top
T23  PIC-RPX  [TEMP-PAD]  23.35,21.9 270 top
T24  PIC-RPX  [TEMP-PAD]  23.35,22.3 270 top
T25  PIC-OUT  [TEMP-PAD]  23.35,22.8 270 top
T26  PIC-OUT  [TEMP-PAD]  22.25,20.7 270 top
T27  PIC-OUT  [TEMP-PAD]  23.95,26.3 270 top
T28  PIC-OUT  [TEMP-PAD]  33.2,15.95 270 top
T29  PIC-OUT  [TEMP-PAD]  23.95,27.3 0 top
T30  PIC-OUT  [TEMP-PAD]  29.2,36.95 180 top
T31  PIC-OUT  [TEMP-PAD]  23.35,23.3 270 top
T32  PIC-OUT  [TEMP-PAD]  23.35,21.5 270 top
T33  PIC-OUT  [TEMP-PAD]  28.8,36.95 270 top
T34  PIC-RPX  [TEMP-PAD]  31.2,36.95 180 top
T35  PIC-RPX  [TEMP-PAD]  34.2,15.95 270 top
T36  PIC-OUT  [TEMP-PAD]  24.1,32 0 top
T37  PIN-AN  [TEMP-PAD]  26.5,15.7 0 top
T38  PIN-AN  [TEMP-PAD]  27.1,15.7 270 top
T39  PIN-AN  [TEMP-PAD]  23.95,24.9 270 top
T40  PIC-RPX  [TEMP-PAD]  42.5,31.95 90 top
T41  PIC-RPX  [TEMP-PAD]  42.1,31.95 90 top
T42  PIC-OUT  [TEMP-PAD]  42.9,31.95 270 top
T43  PIC-RPX  [TEMP-PAD]  39,34.6 0 top
T44  PIC-OUT  [TEMP-PAD]  36.05,34.65 270 top
T45  PIC-RPX  [TEMP-PAD]  76.8,87.3 180 top
T46  PIC-RPX  [TEMP-PAD]  5.1,49.7 0 top
TP1  DNP-TestPoint  [SMD_ROUND_1MM]  80,48.3 0 top
TP2  DNP-TestPoint  [TH_ROUND_14MM08MM]  72.9,84.7 0 top
TP3  DNP-TestPoint  [TH_ROUND_14MM08MM]  71.5,12.4 180 top
TP4  DNP-TestPoint  [TH_ROUND_14MM08MM]  15.7,51.8 180 top
TP5  DNP-TestPoint  [TH_ROUND_14MM08MM]  35.8,71.3 180 top
TP6  DNP-TestPoint  [TH_ROUND_14MM08MM]  44.2,71.3 270 top
U$47  FIDUCIAL  [FIDUCIAL_1MM]  128.02,108.65 0 top
U$128  FIDUCIAL  [FIDUCIAL_1MM]  128.02,106.49 0 top
U$129  FIDUCIAL  [FIDUCIAL_1MM]  128.02,104.33 0 top
U$130  FIDUCIAL  [FIDUCIAL_1MM]  128.02,102.17 0 top
X1  8MHz-5x3.2mm  [7B]  48.9,30 270 top

## Library data of the parts
C1-C30 C32-C70 C72 C74-C80 C82 C85-C88 D5 L1-L8 L10-L13 R1-R132 = DISCRETE
C31 C71 C73 C81 D6 D7 JP1 = SmdDisc
C83 C84 = SMD-ELYT
D2 = st-microelectronics-AOM
D3 D4 = Littelfuse
F1 IC6 = ArdDisp
H1 H2 IC1-IC5 IC8 IC13 J5 J6 J12 PCB2 = ACB
H3-H6 = holes
IC7 IC11 IC16 = Microchip-AON
IC9 = Micron-U
IC10 = Touchstone-U
IC12 = TexasInstruments-AON
IC14 IC15 = Semtech-AOM
J1 J2 J11 = CON-Hirose-AON
J3 J4 = Stewart
J7-J10 = Tyco-U
J14 J15 J17 = CON-pinHeader-AON
L9 = Sumida-UT
O1-O44 T1-T46 TP1-TP6 = TESTPAD
PCB3 = BT_modul
Q1 Q2 = Toshiba-AON
Q3-Q14 = Fairchild-AON
U$47 U$128-U$130 = adafruit
X1 = TXC_Tech-U

## Nets
1.5V-CAM: L5.1 L6.2 R126.1
1.5V-CAM-OUT: C19.1 C20.1 IC5.5 R126.2
3.3V/CAM: C16.1 C17.1 C18.1 IC5.1 IC5.3 L1.1 L2.2 L3.1 L4.2 Q1.6 Q1.P1 R11.2 R12.2 R13.2 R14.2 R15.2 R16.2
+3,3V-FILT: C35.1 IC6.5 R28.1
+3.3V: C15.1 C21.1 C47.1 C48.1 C49.1 C50.1 C51.1 C52.1 C68.1 C69.1 C70.1 C81.+ IC1.2 IC1.16 IC1.37 IC1.46 IC1.55 IC1.62 IC1.86 J14.2 J17.2 L13.1 R8.2 R9.2 R28.2 R65.1 R66.2 R74.2 R81.2 R82.1 R87.1 R89.2 R91.2 R103.2 R104.2 R105.2 R106.2 R129.1
+3.3V/1: C1.1 C2.1 C28.1 C87.1 IC2.37 IC3.20 IC4.20 IC7.8 IC11.2 IC11.8 Q2.3 Q2.P2 R3.2 R4.2 R18.1 R26.1 R27.1
+3.3V/2: C41.1 C86.1 IC12.8 Q1.3 Q1.P2 R30.2 R34.1 R72.1 R73.2
+3.3V/VPS: C27.1 C82.1 IC9.3 IC9.7 IC9.8 J11.4 J15.1 Q2.6 Q2.P1 R25.2
/3.3V1PWRON: IC1.21 O44.P$1 R24.2 T32.P$1
/3.3V2PWRON: IC1.96 O23.P$1 R75.2 T33.P$1
/CAM-PWRON: IC1.95 O24.P$1 R10.1 T30.P$1
/FMEM1-CS: IC1.11 IC9.1 O6.P$1 R25.1 T27.P$1
/MCLR: IC1.13 J17.1 R90.2
/NCS: IC1.23 J15.13 O14.P$1 T26.P$1
/PRESENT: J11.G2 R131.2 T46.P$1
/VPS-PWRON: IC1.17 O9.P$1 R107.2 T31.P$1
A0: IC2.20 IC3.12
A1: IC2.21 IC3.13
A2: IC2.22 IC3.14
A3: IC2.23 IC3.15
A4: IC2.24 IC3.16
A5: IC2.25 IC3.17
A6: IC2.45 IC3.18
A7: IC2.48 IC3.19
A8: IC2.19 IC4.19
A9: IC2.18 IC4.18
A10: IC2.17 IC4.17
A11: IC2.16 IC4.16
A12: IC2.9 IC4.15
A13: IC2.8 IC4.14
A14: IC2.7 IC4.13
A15: IC2.6 R120.2 R121.2
A15-1: IC4.12 R120.1
A15-2: IC1.42 R121.1 TP3.P$1
A16: IC1.32 IC2.5
A17: IC1.33 IC2.4
A18: IC1.34 IC2.3
A19: IC1.35 IC2.2
A20: IC1.41 IC2.1
A+ [HV]: J3.4 J4.4 L8.2
A++ [HV]: IC12.6 IC14.3 R32.2 R34.2 R109.2
AGND1: C3.1 C9.1 J1.2 R6.1
AGND2: C4.1 C10.1 J2.2 R7.1
AVDD: C55.1 C56.1 C88.1 IC1.30 R92.2
AVDD1: C3.2 C9.2 J1.4 L1.2
AVDD2: C4.2 C10.2 J2.4 L2.1
B- [HV]: J3.5 J4.5 L7.2
B-- [HV]: IC12.7 IC14.2 R31.1 R32.1 R108.2
BT-RTS: IC1.83 J14.7 O32.P$1 T44.P$1
BT-RX: IC1.73 J14.3 O37.P$1 T40.P$1
BT-TX: IC1.74 J14.4 O36.P$1 T41.P$1
CON-LED: IC1.78 J14.6 O33.P$1 T43.P$1
CS-SRAM: IC1.38 IC2.12 O17.P$1 R5.2 T28.P$1
CURR-SENSE: C66.1 IC1.14 O8.P$1 R102.2 T39.P$1
D0: IC1.93 IC2.29 IC3.9 IC4.2
D1: IC1.94 IC2.31 IC3.8 IC4.3
D2: IC1.98 IC2.33 IC3.7 IC4.4
D3: IC1.99 IC2.35 IC3.6 IC4.5
D4: IC1.100 IC2.38 IC3.5 IC4.6
D5: IC1.3 IC2.40 IC3.4 IC4.7
D6: IC1.4 IC2.42 IC3.3 IC4.8
D7: IC1.5 IC2.44 IC3.2 IC4.9
D+: IC1.57 IC15.3 J12.2_D+
D-: IC1.56 IC15.2 J12.3_D-
DGND [GND]: C1.2 C2.2 C5.2 C6.2 C7.1 C8.1 C11.2 C12.2 C13.1 C14.1 C15.2 C16.2 C17.2 C18.2 C19.2 C20.2 C22.2 C23.2 C24.1 C27.2 C28.2 C29.2 C30.2 C31.- C32.2 C35.2 C36.2 C37.2 C38.2 C39.2 C40.2 C41.2 C46.2 C47.2 C48.2 C49.2 C50.2 C51.2 C52.2 C53.2 C54.2 C55.2 C56.2 C57.2 C58.2 C59.2 C60.2 C61.2 C62.2 C63.2 C64.2 C65.2 C66.2 C67.2 C75.2 C76.2 C77.2 C78.2 C79.2 C80.2 C81.- C82.2 C83.2 C84.2 C85.2 C86.2 C87.2 C88.2 D2.- D5.1+ D7.A IC1.15 IC1.31 IC1.36 IC1.45 IC1.65 IC1.75 IC2.14 IC2.15 IC2.26 IC2.27 IC2.46 IC2.47 IC3.1 IC3.10 IC4.1 IC4.10 IC5.2 IC6.2 IC7.1 IC7.2 IC7.3 IC7.4 IC7.7 IC8.10 IC8.EP IC9.4 IC10.1 IC10.2 IC11.1 IC11.3 IC11.4 IC12.5 IC13.3 IC14.1 IC15.1 IC16.4 J1.15 J2.15 J5.1 J6.1 J11.6 J11.G1 J11.G3 J11.G4 J11.G5 J11.G6 J12.4_GND J12.SH1 J12.SH2 J14.1 J15.9 J17.3 L12.1 PCB2.VPS_PCB_1 PCB3.1 Q3.1 Q10.4 Q11.4 Q12.4 Q13.4 Q14.1 R1.1 R2.1 R5.1 R6.2 R7.2 R17.2 R19.2 R21.2 R31.2 R40.1 R41.2 R43.1 R44.2 R46.1 R48.1 R51.1 R52.2 R53.2 R54.2 R57.1 R58.2 R59.2 R60.2 R64.2 R67.2 R70.2 R71.2 R76.2 R80.2 R83.2 R86.2 R88.2 R96.2 R99.2 R112.2 R118.2 R127.1
DGND-F [HV]: D3.A D4.A J3.2 J3.7 J3.8 J4.2 J4.7 J4.8 L12.2
DOOR1IN: IC1.50 O21.P$1 Q13.3 R74.1 T12.P$1
DOOR2IN: IC1.77 O34.P$1 Q12.3 R89.1 T11.P$1
DOOR-IN-EN: IC1.51 O43.P$1 Q12.2 Q13.2 R76.1 R88.1 T8.P$1
DOVDD1: C5.1 C11.1 J1.11 L3.2
DOVDD2: C6.1 C12.1 J2.11 L4.1
DVDD1: C7.2 C13.2 J1.10 L5.2
DVDD2: C8.2 C14.2 J2.10 L6.1
EN: IC1.18 J15.8 O10.P$1 T25.P$1
GATE-Q12A: C33.2 Q4.6 Q5.1 R42.2
GATE-Q12B: C34.2 Q4.3 Q5.3 R45.2
HREF: IC1.6 J1.9 J2.9 O2.P$1 T18.P$1
INFRA1PWM: IC1.90 O27.P$1 R113.2 T34.P$1
INFRA2PWM: IC1.40 O19.P$1 R119.2 T35.P$1
IRQ: IC1.19 J15.3 O11.P$1 T24.P$1
L1CTL [HV]: C79.1 J5.3 Q6.4
L1PWR [HV]: C80.1 J5.2 Q6.6
L2CTL: C78.1 J6.3 Q8.6
L2PWR: C77.1 J6.2 Q8.4
LAN-CTL: IC1.84 IC12.2 IC12.3 O31.P$1 R71.1 T15.P$1
LAN-RX: IC1.88 IC12.1 O29.P$1 R72.2 T13.P$1
LAN-TX: IC1.87 IC12.4 O30.P$1 R73.1 T14.P$1
LED-PIC: IC1.1 O1.P$1 R29.1 T36.P$1 TP4.P$1
LEH-SRAM: IC1.43 IC4.11 R2.2
LEL-SRAM: IC1.44 IC3.11 R1.2
LOCK1CTL: IC1.61 O39.P$1 Q7.5 R54.1 T1.P$1
LOCK1IN: IC1.49 O20.P$1 Q11.3 R66.1 T10.P$1
LOCK2CTL: IC1.91 O26.P$1 Q9.2 R58.1 T2.P$1
LOCK2IN: IC1.89 O28.P$1 Q10.3 R81.1 T9.P$1
LOCK12PWR: IC1.92 O25.P$1 Q7.2 Q9.5 R52.1 R60.1 T4.P$1
LOCK-IN-EN: IC1.60 O40.P$1 Q10.2 Q11.2 R67.1 R83.1 T6.P$1
N$1: Q1.1 R8.1
N$2 [HV]: J5.4 R62.1
N$3: C21.2 Q1.2 R9.1 R10.2
N$4: Q11.1 Q11.5 R64.1
N$5: Q11.6 R63.2
N$6: Q12.1 Q12.5 R86.1
N$7: Q10.1 Q10.5 R80.1
N$8 [HV]: J7.2 R68.1
N$9 [GND]: Q13.1 Q13.5 R70.1
N$10: Q12.6 R85.2
N$11 [HV]: Q13.6 R69.2
N$12 [HV]: C32.1 R68.2 R69.1
N$13: IC11.7 R18.2 TP1.P$1
N$14: D5.2 R29.2
N$15: Q7.1 R51.2
N$16: Q4.1 R40.2
N$17: Q4.4 R43.2
N$18: C39.1 IC14.4 R30.1
N$19: Q10.6 R79.2
N$20 [HV]: R35.2 R36.1 R37.2 R38.1
N$21 [HV]: C29.1 F1.1 IC10.5 R39.2
N$22: Q9.1 R57.2
N$23: C42.2 Q6.1 Q7.6 R50.2
N$24: L13.2 R92.1
N$25: Q7.4 R53.1
N$26 [HV]: J10.2 R116.1 R122.1
N$27: IC6.1 R46.2 R47.1
N$28: IC6.3 R33.1 R47.2
N$29: C44.2 Q8.1 Q9.6 R56.2
N$30: Q9.4 R59.1
N$31: C43.2 Q6.3 Q7.3 R55.2
N$32: C61.1 IC1.64 X1.1
N$33: C45.2 Q8.3 Q9.3 R61.2
N$35: Q2.1 R104.1
N$36: Q1.4 R106.1
N$37 [HV]: C46.1 R62.2 R63.1
N$38 [HV]: F1.2 Q5.6 R35.1 R37.1 R97.1 R132.1
N$39: C60.1 IC1.63 X1.3
N$40: J6.4 R78.1
N$41 [HV]: C37.1 R78.2 R79.1
N$43 [HV]: J8.2 R84.1
N$44: C58.1 C59.1 IC13.1 R93.2
N$46 [HV]: C71.+ C72.1 J9.1 R124.2
N$47 [HV]: C73.+ C74.1 J10.1 R125.2
N$48: R94.2 R95.1
N$49: C62.1 IC16.3 R95.2 R96.1
N$50: C26.2 IC8.6 R19.1 R20.2
N$51: C24.2 R77.2
N$52 [HV]: C25.1 D7.K IC8.3 L9.1
N$53: IC8.8 R17.1
N$54: IC8.7 R77.1
N$55 [HV]: IC8.5 JP1.2 R22.2
N$56: Q2.4 R105.1
N$57 [HV]: C25.2 IC8.2
N$58: C68.2 Q2.2 R87.2 R107.1
N$59 [HV]: L7.1 R108.1
N$60: R97.2 R98.1
N$61 [HV]: C38.1 R84.2 R85.1
N$62: R23.1 R49.2
N$63: C63.1 IC16.5 R98.2 R99.1
N$64: IC16.6 IC16.7 R100.2
N$65: C67.1 IC16.8 R103.1
N$66: IC16.1 IC16.2 R101.2
N$67: C69.2 Q2.5 R24.1 R65.2
N$68: IC10.3 R102.1
N$70: C40.1 R90.1 R91.1
N$73: C70.2 Q1.5 R75.1 R82.2
N$74 [HV]: L8.1 R109.1
N$76 [HV]: J9.2 R110.1 R114.1
N$77 [HV]: C73.- C74.2 R116.2 R117.1 R122.2 R123.1
N$78 [HV]: C71.- C72.2 R110.2 R111.1 R114.2 R115.1
N$79: Q3.6 R111.2 R115.2
N$80: Q3.2 R112.1 R113.1
N$81: Q14.6 R117.2 R123.2
N$83: Q14.2 R118.1 R119.1
N$85 [HV]: C85.1 D6.A IC15.4 J12.1_VCC R128.1 TP5.P$1
N$87 [HV]: JP1.1 R21.1
OE-SRAM: IC1.82 IC2.28 R3.1
OUT+3.3V [GND]: C26.1 C30.1 C31.+ D2.+ IC8.1 L9.2 R20.1 R129.2
PCLK: IC1.76 J1.17 J2.17 O35.P$1 T17.P$1
PGC: IC1.24 J17.5 R131.1
PGD: IC1.25 J17.4 R130.2
POWER-GOOD: IC6.4 R130.1 T45.P$1 TP2.P$1
PWDN-CAM1: IC1.97 J1.8 O22.P$1 R12.1 T20.P$1
PWDN-CAM2: IC1.39 J2.8 O18.P$1 R16.1 T21.P$1
REF2,5V: C57.1 IC1.29 IC13.2
REF-EN: IC1.28 R93.1
RESET-CAM1: C76.1 J1.6 R11.1
RESET-CAM2: C75.1 J2.6 R15.1
SCL1-EEPROM: IC1.66 IC7.6 IC11.6 R26.2
SCLK2-SPI: IC1.10 IC9.6 J11.5 J15.12
SD-CS: IC1.9 J11.2 O5.P$1 R127.2 T29.P$1
SDA1-EEPROM: IC1.67 IC7.5 IC11.5 R27.2
SDI2-MISO: IC1.22 IC9.2 J11.7 J15.11 O13.P$1 T22.P$1
SDO2-MOSI: IC1.20 IC9.5 J11.3 J15.14 O12.P$1 T23.P$1
SIO-C-CAM: IC1.58 J1.5 J2.5 R13.1
SIO-D-CAM: IC1.59 J1.3 J2.3 R14.1
VBAT [HV]: C22.1 C23.1 C42.1 C43.1 C44.1 C45.1 C83.1 C84.1 IC8.4 IC10.4 J5.5 J6.5 J7.1 J8.1 JP1.3 Q6.2 Q6.5 Q8.2 Q8.5 R22.1 R33.2 R39.1 R50.1 R55.1 R56.1 R61.1 R124.1 R125.1
VBAT-LAN [HV]: D3.C J3.1 J3.3 J4.1 J4.3 L11.2
VBAT-LAN-F [HV]: C33.1 C34.1 D6.K L11.1 Q5.2 Q5.5 R36.2 R38.2 R42.1 R45.1 R94.1 TP6.P$1
VBAT-ON: IC1.52 O42.P$1 Q4.2 R41.1 R132.2 T5.P$1
VBAT-SENSE: C64.1 IC1.26 O15.P$1 R100.1 T37.P$1
VBATLAN-SENSE: C36.1 IC1.27 O16.P$1 R101.1 T38.P$1
VBUS: IC1.54 R128.2
VCAP: C53.1 C54.1 IC1.85
VPS-ON: IC1.53 O41.P$1 Q4.5 R44.1 T7.P$1
VPS-PWR [HV]: D4.C J3.6 J4.6 L10.2
VPS-PWR-F: L10.1 Q5.4 R23.2
VPS-SENSE: C65.1 IC1.12 O7.P$1 R48.2 R49.1 T3.P$1
VSYNC: IC1.8 J1.7 J2.7 O4.P$1 T19.P$1
WAKE-SW: IC1.72 J14.5 O38.P$1 T42.P$1
WE-SRAM: IC1.81 IC2.11 R4.1
XCLK1: IC1.7 J1.13 J2.13 O3.P$1 T16.P$1
Y2: IC1.68 J1.19 J2.19
Y3: IC1.69 J1.21 J2.21
Y4: IC1.70 J1.22 J2.22
Y5: IC1.71 J1.20 J2.20
Y6: IC1.79 J1.18 J2.18
Y7: IC1.80 J1.16 J2.16
Y8: IC1.47 J1.14 J2.14
Y9: IC1.48 J1.12 J2.12

## Tracks (layer width: path | path; a pad name or v marks a point on that pad's centre or on a via)
1.5V-CAM  (2 unrouted)
1.5V-CAM-OUT  (3 unrouted)
3.3V/CAM  (16 unrouted)
+3,3V-FILT  (2 unrouted)
+3.3V  (37 unrouted)
+3.3V/1  (16 unrouted)
+3.3V/2  (8 unrouted)
+3.3V/VPS  (9 unrouted)
/3.3V1PWRON  (3 unrouted)
/3.3V2PWRON  (3 unrouted)
/CAM-PWRON  (3 unrouted)
/FMEM1-CS  (4 unrouted)
/MCLR  (2 unrouted)
/NCS  (3 unrouted)
/PRESENT  (2 unrouted)
/VPS-PWRON  (3 unrouted)
A0  (1 unrouted)
A1  (1 unrouted)
A2  (1 unrouted)
A3  (1 unrouted)
A4  (1 unrouted)
A5  (1 unrouted)
A6  (1 unrouted)
A7  (1 unrouted)
A8  (1 unrouted)
A9  (1 unrouted)
A10  (1 unrouted)
A11  (1 unrouted)
A12  (1 unrouted)
A13  (1 unrouted)
A14  (1 unrouted)
A15  (2 unrouted)
A15-1  (1 unrouted)
A15-2  (2 unrouted)
A16  (1 unrouted)
A17  (1 unrouted)
A18  (1 unrouted)
A19  (1 unrouted)
A20  (1 unrouted)
A+  (2 unrouted)
A++  (4 unrouted)
AGND1  (3 unrouted)
AGND2  (3 unrouted)
AVDD  (4 unrouted)
AVDD1  (3 unrouted)
AVDD2  (3 unrouted)
B-  (2 unrouted)
B--  (4 unrouted)
BT-RTS  (3 unrouted)
BT-RX  (3 unrouted)
BT-TX  (3 unrouted)
CON-LED  (3 unrouted)
CS-SRAM  (4 unrouted)
CURR-SENSE  (4 unrouted)
D0  (3 unrouted)
D1  (3 unrouted)
D2  (3 unrouted)
D3  (3 unrouted)
D4  (3 unrouted)
D5  (3 unrouted)
D6  (3 unrouted)
D7  (3 unrouted)
D+  (2 unrouted)
D-  (2 unrouted)
DGND  (168 unrouted)
  pour Top (isolate 0.35): 0.5,0.5 88.5,0.5 88.5,121.5 0.5,121.5
  pour Bottom (isolate 0.35): 0.5,0.5 88.5,0.5 88.5,121.5 0.5,121.5
DGND-F  (8 unrouted)
DOOR1IN  (4 unrouted)
DOOR2IN  (4 unrouted)
DOOR-IN-EN  (6 unrouted)
DOVDD1  (3 unrouted)
DOVDD2  (3 unrouted)
DVDD1  (3 unrouted)
DVDD2  (3 unrouted)
EN  (3 unrouted)
GATE-Q12A  (3 unrouted)
GATE-Q12B  (3 unrouted)
HREF  (4 unrouted)
INFRA1PWM  (3 unrouted)
INFRA2PWM  (3 unrouted)
IRQ  (3 unrouted)
L1CTL  (2 unrouted)
L1PWR  (2 unrouted)
L2CTL  (2 unrouted)
L2PWR  (2 unrouted)
LAN-CTL  (5 unrouted)
LAN-RX  (4 unrouted)
LAN-TX  (4 unrouted)
LED-PIC  (4 unrouted)
LEH-SRAM  (2 unrouted)
LEL-SRAM  (2 unrouted)
LOCK1CTL  (4 unrouted)
LOCK1IN  (4 unrouted)
LOCK2CTL  (4 unrouted)
LOCK2IN  (4 unrouted)
LOCK12PWR  (6 unrouted)
LOCK-IN-EN  (6 unrouted)
N$1  (1 unrouted)
N$2  (1 unrouted)
N$3  (3 unrouted)
N$4  (2 unrouted)
N$5  (1 unrouted)
N$6  (2 unrouted)
N$7  (2 unrouted)
N$8  (1 unrouted)
N$9  (2 unrouted)
N$10  (1 unrouted)
N$11  (1 unrouted)
N$12  (2 unrouted)
N$13  (2 unrouted)
N$14  (1 unrouted)
N$15  (1 unrouted)
N$16  (1 unrouted)
N$17  (1 unrouted)
N$18  (2 unrouted)
N$19  (1 unrouted)
N$20  (3 unrouted)
N$21  (3 unrouted)
N$22  (1 unrouted)
N$23  (3 unrouted)
N$24  (1 unrouted)
N$25  (1 unrouted)
N$26  (2 unrouted)
N$27  (2 unrouted)
N$28  (2 unrouted)
N$29  (3 unrouted)
N$30  (1 unrouted)
N$31  (3 unrouted)
N$32  (2 unrouted)
N$33  (3 unrouted)
N$35  (1 unrouted)
N$36  (1 unrouted)
N$37  (2 unrouted)
N$38  (5 unrouted)
N$39  (2 unrouted)
N$40  (1 unrouted)
N$41  (2 unrouted)
N$43  (1 unrouted)
N$44  (3 unrouted)
N$46  (3 unrouted)
N$47  (3 unrouted)
N$48  (1 unrouted)
N$49  (3 unrouted)
N$50  (3 unrouted)
N$51  (1 unrouted)
N$52  (3 unrouted)
N$53  (1 unrouted)
N$54  (1 unrouted)
N$55  (2 unrouted)
N$56  (1 unrouted)
N$57  (1 unrouted)
N$58  (3 unrouted)
N$59  (1 unrouted)
N$60  (1 unrouted)
N$61  (2 unrouted)
N$62  (1 unrouted)
N$63  (3 unrouted)
N$64  (2 unrouted)
N$65  (2 unrouted)
N$66  (2 unrouted)
N$67  (3 unrouted)
N$68  (1 unrouted)
N$70  (2 unrouted)
N$73  (3 unrouted)
N$74  (1 unrouted)
N$76  (2 unrouted)
N$77  (5 unrouted)
N$78  (5 unrouted)
N$79  (2 unrouted)
N$80  (2 unrouted)
N$81  (2 unrouted)
N$83  (2 unrouted)
N$85  (5 unrouted)
N$87  (1 unrouted)
OE-SRAM  (2 unrouted)
OUT+3.3V  (7 unrouted)
PCLK  (4 unrouted)
PGC  (2 unrouted)
PGD  (2 unrouted)
POWER-GOOD  (3 unrouted)
PWDN-CAM1  (4 unrouted)
PWDN-CAM2  (4 unrouted)
REF2,5V  (2 unrouted)
REF-EN  (1 unrouted)
RESET-CAM1  (2 unrouted)
RESET-CAM2  (2 unrouted)
SCL1-EEPROM  (3 unrouted)
SCLK2-SPI  (3 unrouted)
SD-CS  (4 unrouted)
SDA1-EEPROM  (3 unrouted)
SDI2-MISO  (5 unrouted)
SDO2-MOSI  (5 unrouted)
SIO-C-CAM  (3 unrouted)
SIO-D-CAM  (3 unrouted)
VBAT  (27 unrouted)
VBAT-LAN  (5 unrouted)
VBAT-LAN-F  (11 unrouted)
VBAT-ON  (5 unrouted)
VBAT-SENSE  (4 unrouted)
VBATLAN-SENSE  (4 unrouted)
VBUS  (1 unrouted)
VCAP  (2 unrouted)
VPS-ON  (4 unrouted)
VPS-PWR  (3 unrouted)
VPS-PWR-F  (2 unrouted)
VPS-SENSE  (5 unrouted)
VSYNC  (4 unrouted)
WAKE-SW  (3 unrouted)
WE-SRAM  (2 unrouted)
XCLK1  (4 unrouted)
Y2  (2 unrouted)
Y3  (2 unrouted)
Y4  (2 unrouted)
Y5  (2 unrouted)
Y6  (2 unrouted)
Y7  (2 unrouted)
Y8  (2 unrouted)
Y9  (2 unrouted)

## Text on the board
Top: USB by melo byt HOST a asi micro
tPlace: ACB 1.0 | (C) 2017 eLock Technologies LCC
101-poznamky: Konektor pro BT z bottomu - neni na ose desky ale 3mm od osy | aby pripadny zapichnuty BT modul byl vycentrovany vuci desce | (BT je siroky 29mm vcetne trcici antenky, ktera trci 6mm) | ve vertikalnim smeru lze konektor BT libovolne posunout | tento postor pro drzak kamery | tento postor pro drzak kamery | bych chtel nechat volny | bych chtel nechat volny | v topu i bottomu | v topu i bottomu | tedy trochu vic nez vlastni | tedy trochu vic nez vlastni | holder jak je namalovany | holder jak je namalovany | myslim ze takto by SD vychazela nejlepe | TP1 musi byt pristupny nezakryty VPS | takto by sla SD vytahnout i ze sestavy | tedy poku by tam nebyl distanční sloupek pro BT | Montazni otvor BT asi ne, byla by to hrozna drbacka | FLASH, VPS a SD karta by mely byt u sebe | maji spolecnou SPI a napajeni - tzn 4 draty | tady je VPS asi v docela optimalni pozici | jeste by sla posunout 1mm doleva (az k hrane desky) | a 1mm dolu (jeste by nezakryvala mont. sroub) | zasobni kond na konci vodice napajeni 3.3V | myslim ze tohle je pekne misto pro USB | tedy tady nekde | myslim ze tohle je pekne misto pro programovaci konektor | montazni odvory jsou ted 3.81mm (150mil) od hran desky | byly 5.08mm (200mil) od hran desky, dost to pomohlo | montazni otvory jsou 6,6mm/3,2mm- zmenseny z 7,0mm | M3 strouby maji hlavu cca 6,0mm + vule sroubu v dire -> 6.4mm je minimum | podlozka po M3 je 7,0/3,2mm a to je taky spravny rozmer montazniho otvoru